# Altium PCB PD_PCB_with_routing.PcbDoc
Units mm, origin at the board's own origin, x right, y up, seen from the top; angles counter-clockwise.
Board outline 60.05 x 60 mm, 2 copper layers (Top Layer, Bottom Layer); 49 components, 27 nets, 162 pads, 63 vias.
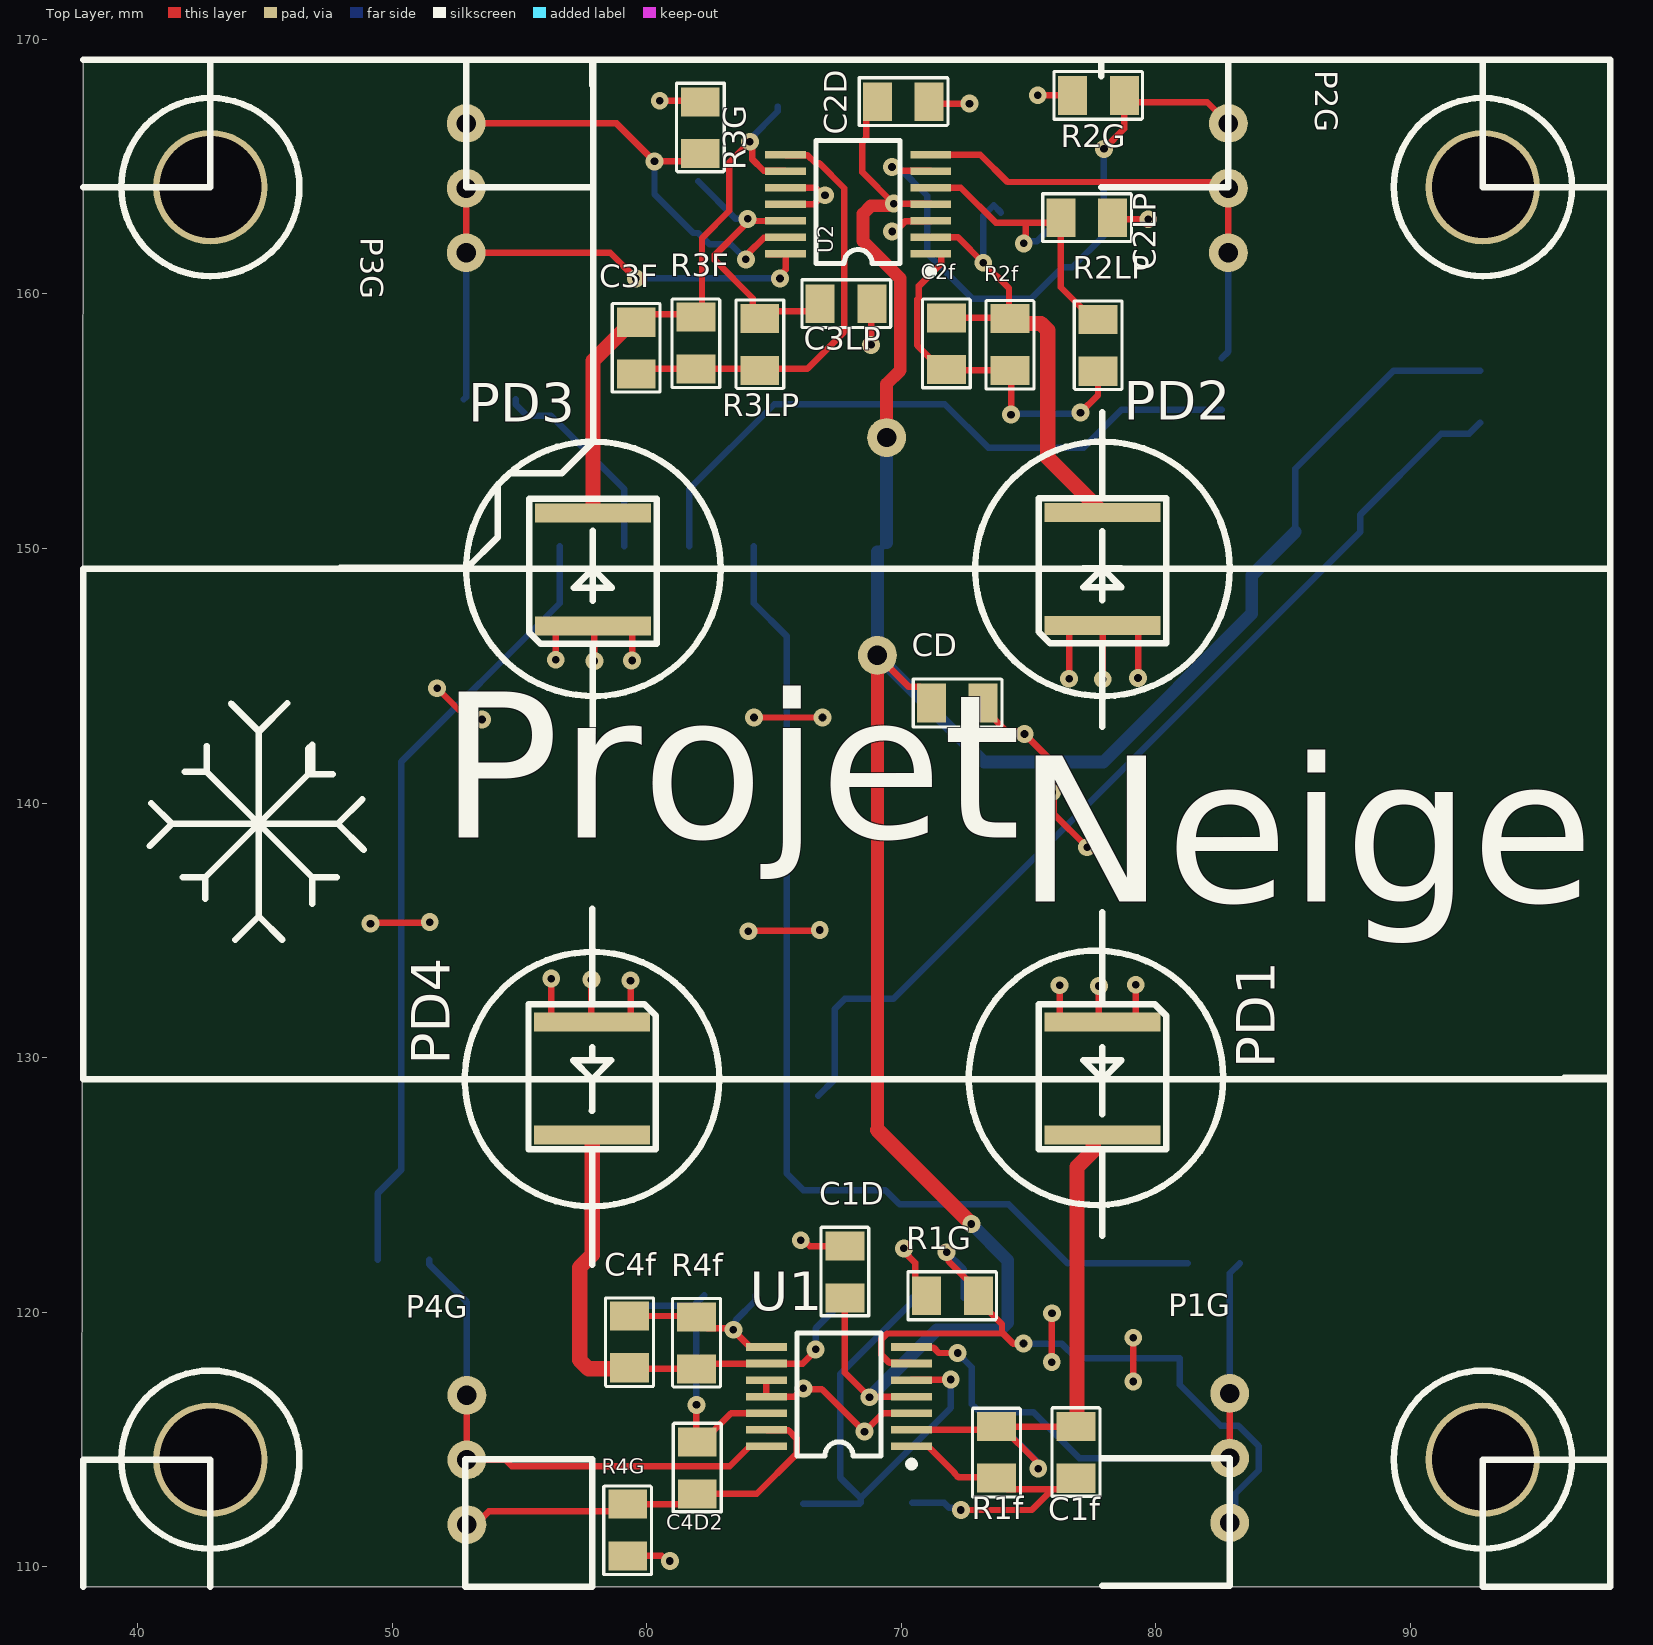
[diagram p0: Top Layer view]
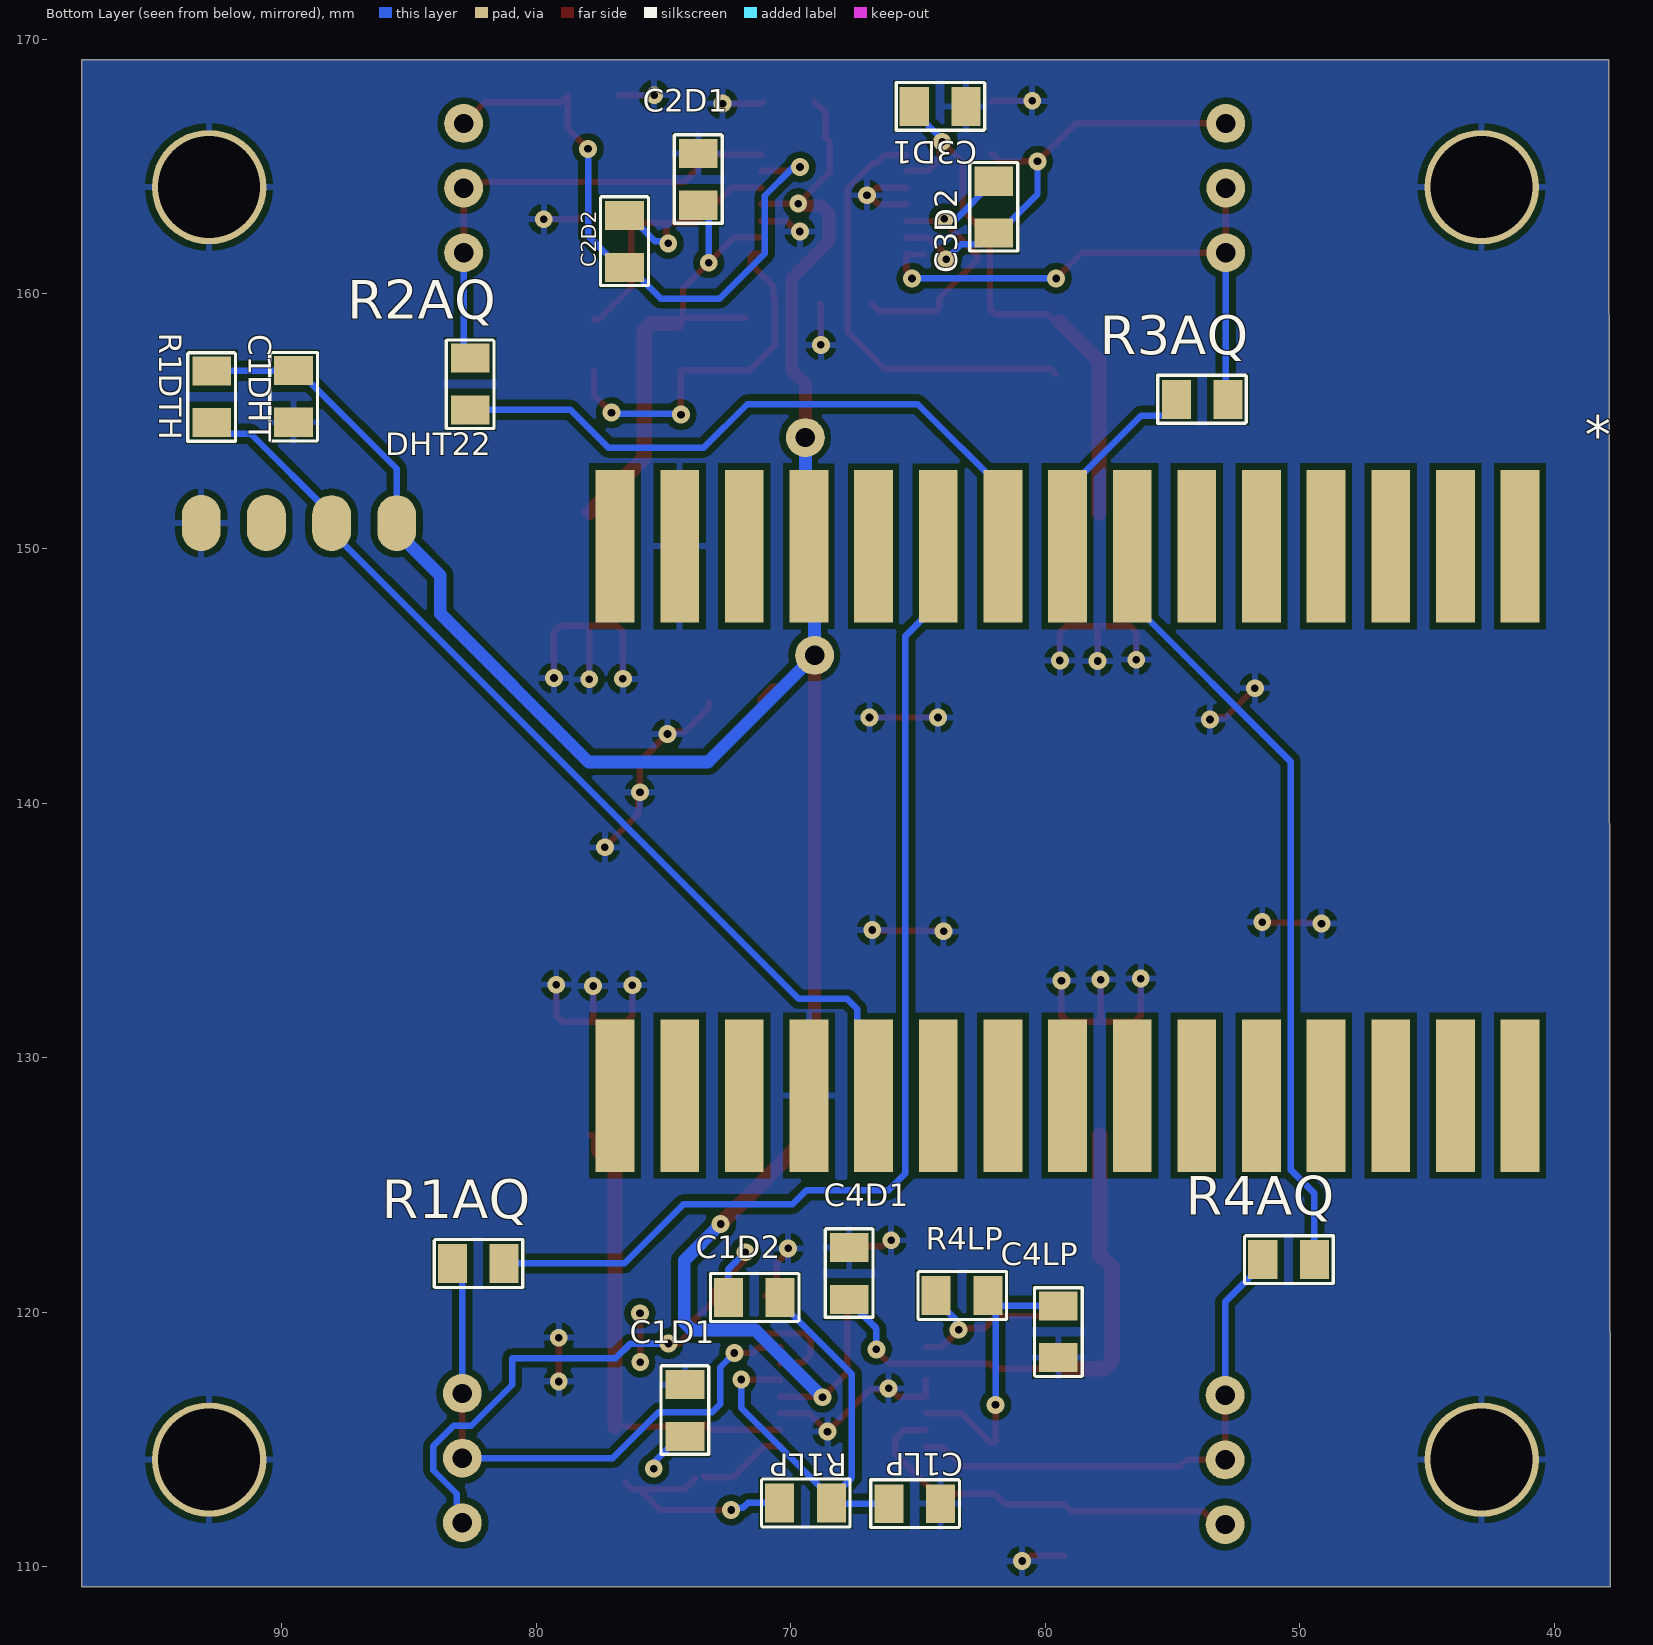
[diagram p1: Bottom Layer view, seen from below]
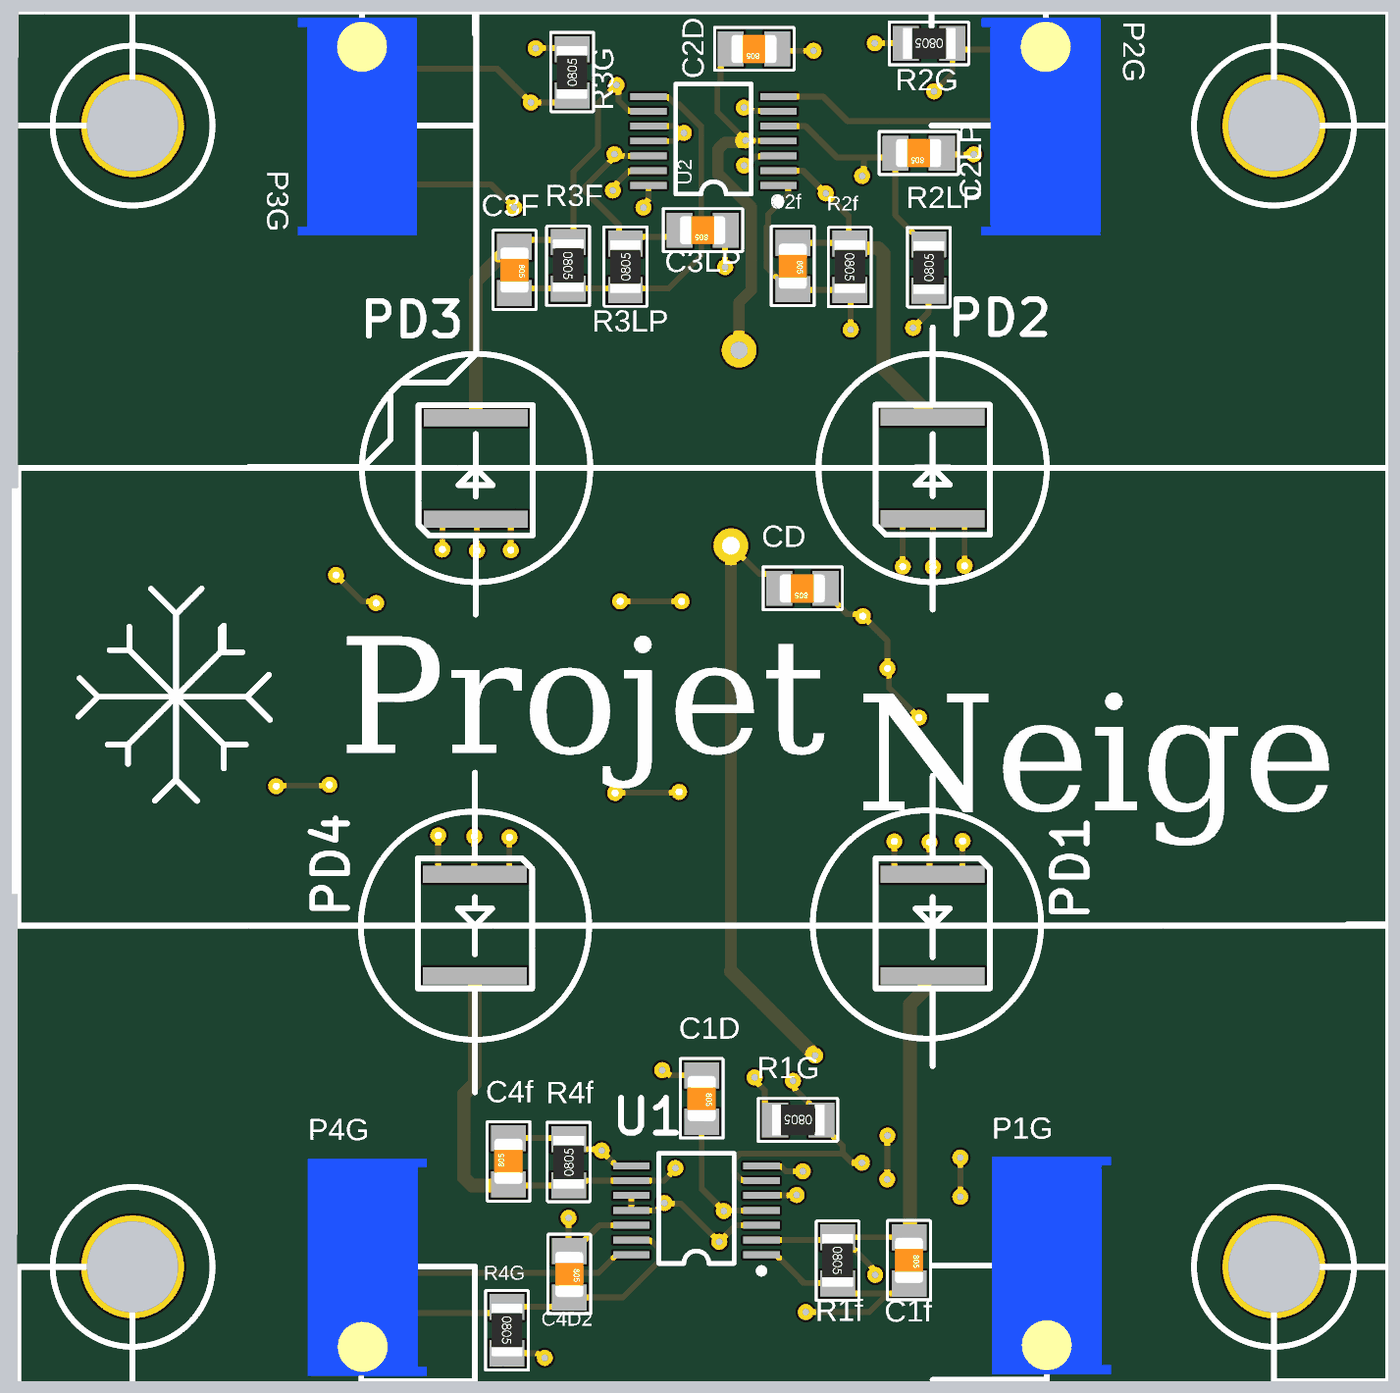
[diagram p2: 3D render of the assembled board from above, using the file's embedded part models]
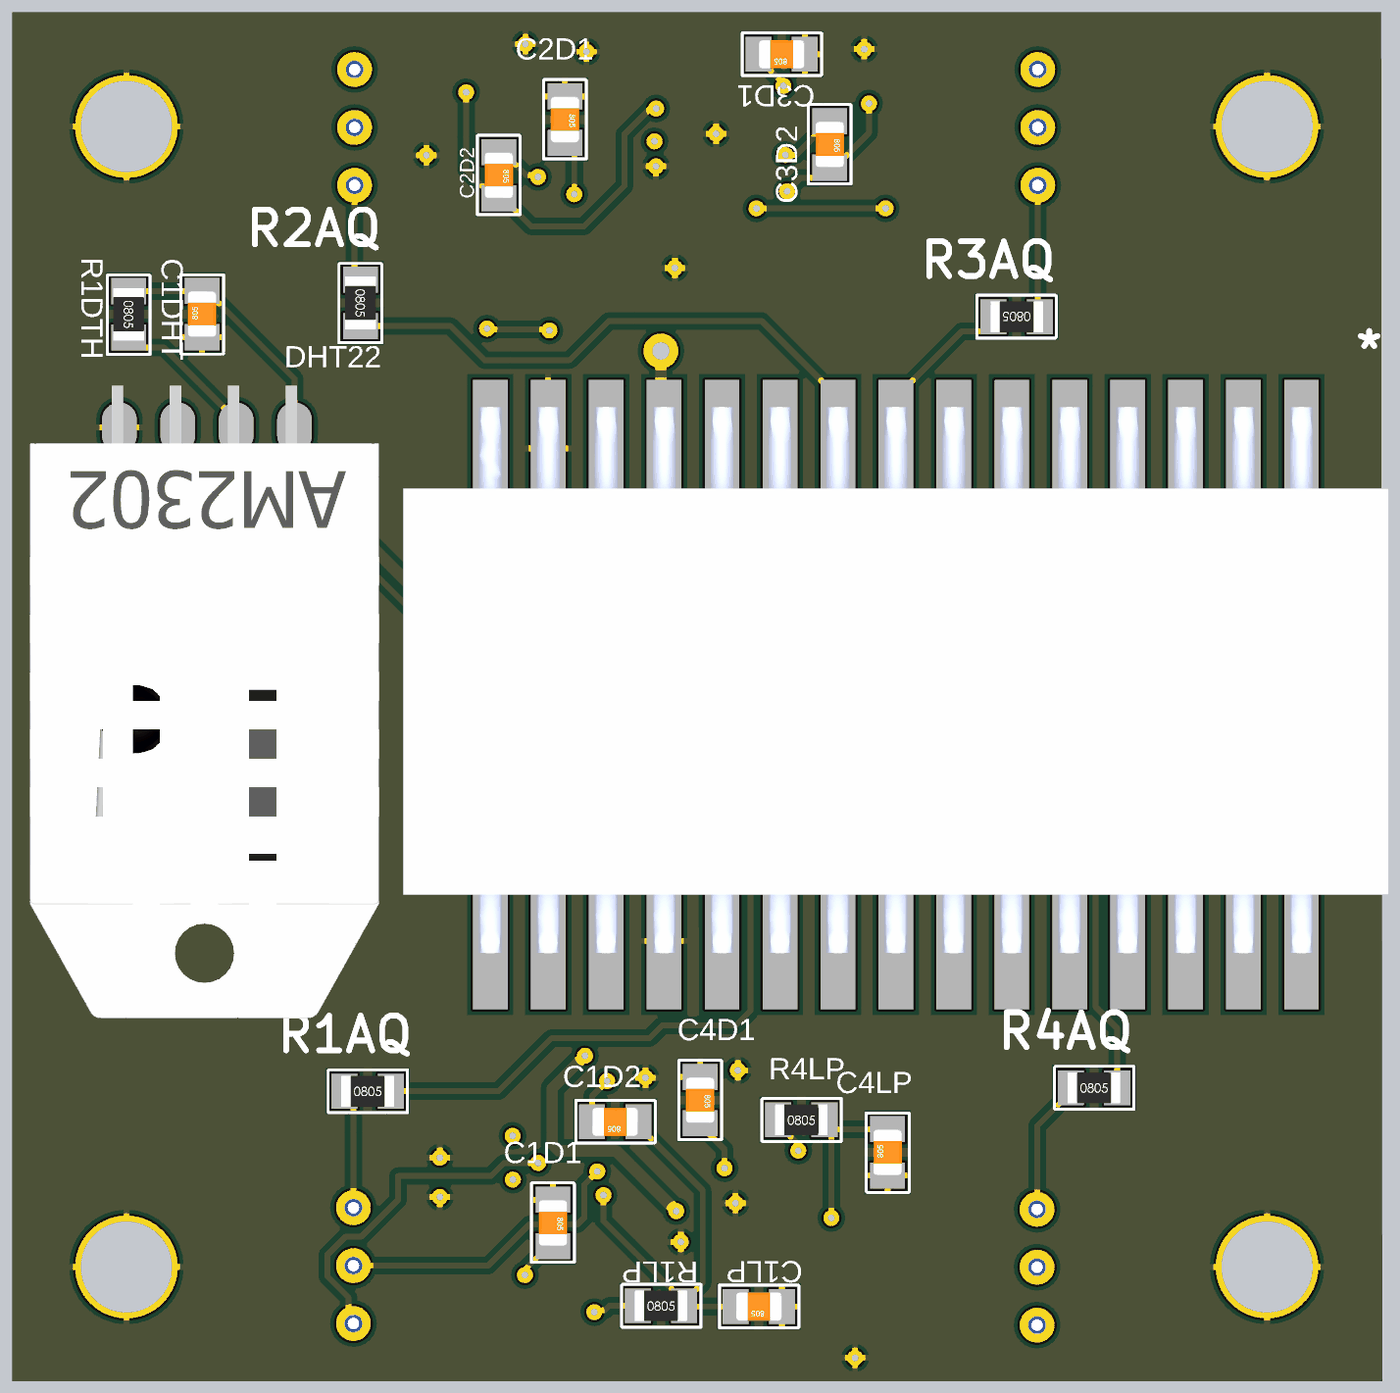
[diagram p3: 3D render of the assembled board from below, using the file's embedded part models]

## Layer stack, top to bottom
Top Solder: solder mask 0.0102, Solder Resist, Dk 3.5
Top Layer: signal copper 0.0356
Dielectric 1: dielectric 0.32, FR-4, Dk 4.8
Bottom Layer: signal copper 0.0356
Bottom Solder: solder mask 0.0102, Solder Resist, Dk 3.5

## Board outline
37.85,169.2 97.85,169.2 97.85,109.2 37.8,109.2

## Design rules (kind name [scope] priority, off if disabled: settings)
Clearance [All] p1: gap=0.254 ignorepadtopadclearanceinfootprint=FALSE except(0: Arc-Hole Track-Hole SMDPad-Hole THPad-Hole Via-Hole Fill-Hole Poly-Hole Region-Hole Text-Hole)
PolygonConnect [All] p1: connectstyle=Relief reliefconductorwidth=0.254 reliefentries=4 polygonreliefangle="90 Angle" airgapwidth=0.254
RoutingVias [All] p1: holewidth=0.711 width=1.27 viastyle="Through Hole" minholewidth=0.711 minwidth=1.27 maxholewidth=0.711 maxwidth=1.27
SilkToSilkClearance [All] p1: silktosilkclearance=0.05
SilkToSolderMaskClearance [IsPad] p1: minsilkscreentomaskgap=0.05 clearancetoexposedcopper=TRUE
SolderMaskExpansion [All] p1: expansion=0.102 istentingtop=FALSE
Width [All] p1: maxlimit=0.6 minlimit=0.254 preferedwidth=0.254 minimp=50.000000 maximp=50.000000 favimp=50.000000
28 further rules are at their usual default settings.

## Classes and differential pairs
component class Sheet1: * C1DHT CD DHT22 R1DTH
component class photodiodeAmplifier: C1D C1D1 C1D2 C1f C1LP C2D C2D1 C2D2 C2f C2LP C3D1 C3D2 C3F C3LP C4D1 C4D2 C4f C4LP P1G P2G P3G P4G PD1 PD2 PD3 PD4 R1AQ R1f R1G R1LP R2AQ R2f R2G R2LP R3AQ R3F R3G R3LP R4AQ R4f R4G R4LP U1 U2

## Components (designator, comment, footprint, x,y, rotation, side; value= is the part's Value field where it differs from the comment)
* "Arduino_Nano" "Arduino Nano SMD" 76.9,129.77 r90 bottom
C1D "10nF" "CAP 0805" 67.6,121.45 r90 top value="5 pF"
C1D1 "100 pF" "CAP 0805" 74.337,116.01 r90 bottom value="5 pF"
C1D2 "100 pF" "CAP 0805" 71.55,120.75 r180 bottom value="5 pF"
C1DHT "100 nF" "CAP 0805" 89.35,156.1 r270 bottom value="5 pF"
C1f "100 nF" "CAP 0805" 76.68,114.36 r90 top value="5 pF"
C1LP "1 uF" "CAP 0805" 65.25,112.65 r180 bottom value="5 pF"
C2D "10nF" "CAP 0805" 69.95,167.74 r0 top value="5 pF"
C2D1 "100 pF" "CAP 0805" 73.81,164.38 r90 bottom value="5 pF"
C2D2 "100 pF" "CAP 0805" 76.706,161.939 r90 bottom value="5 pF"
C2f "100 nF" "CAP 0805" 71.59,157.92 r90 top value="5 pF"
C2LP "1 uF" "CAP 0805" 77.16,163.18 r0 top value="5 pF"
C3D1 "100 pF" "CAP 0805" 64.25,167.55 r180 bottom value="5 pF"
C3D2 "100pF" "CAP 0805" 62.2,163.29 r90 bottom value="5 pF"
C3F "100 nF" "CAP 0805" 59.4,157.75 r90 top value="5 pF"
C3LP "1 uF" "CAP 0805" 67.7,159.8 r0 top value="5 pF"
C4D1 "100pF" "CAP 0805" 67.88,121.39 r90 bottom value="5 pF"
C4D2 "100pF" "CAP 0805" 61.8,113.75 r90 top value="5 pF"
C4f "100 nF" "CAP 0805" 59.5,118.95 r270 top value="5 pF"
C4LP "1 uF" "CAP 0805" 59.3,119.35 r270 bottom value="5 pF"
CD "100 nF" "CAP 0805" 72.07,144.11 r0 top value="5 pF"
DHT22 "DHT22" "DHT22 - 90deg SMD" 85.48,150.995 r270 bottom
P1G "*" "potentiometer trimmer straight" 82.9,116.8 r270 top value=100k
P2G "Potentiometer Trimmer 90deg" "potentiometer trimmer straight" 82.85,161.62 r90 top value=100k
P3G "Potentiometer Trimmer 90deg" "potentiometer trimmer straight" 52.9,161.62 r90 top value=100k
P4G "" "potentiometer trimmer straight" 52.93,116.73 r270 top value=100k
PD1 "TEMD5080X01" "Photodiode SMD PKG-1" 77.9,131.4 r0 top
PD2 "TEMD5080X01" "Photodiode SMD PKG-1" 77.9,146.97 r180 top
PD3 "TEMD5080X01" "Photodiode SMD PKG-1" 57.88,146.95 r180 top
PD4 "TEMD5080X01" "Photodiode SMD PKG-1" 57.85,131.4 r0 top
R1AQ "RES 0805" "RES 0805" 83.266,121.597 r0 bottom value=1k
R1DTH "RES 0805" "RES 0805" 93.063,156.956 r90 bottom value=10k
R1f "RES 0805" "RES 0805" 73.427,115.476 r90 top value=100k
R1G "RES 0805" "RES 0805" 73,120.95 r0 top value=2.2k
R1LP "RES 0805" "RES 0805" 70.406,112.187 r0 bottom value=10k
R2AQ "RES 0805" "RES 0805" 82.903,157.456 r90 bottom value=1k
R2f "RES 0805" "RES 0805" 73.957,159.004 r90 top value=100k
R2G "RES 0805" "RES 0805" 78.736,168.113 r0 top value=2.2k
R2LP "RES 0805" "RES 0805" 78.04,156.99 r270 top value=10k
R3AQ "RES 0805" "RES 0805" 52.834,156.173 r180 bottom value=1k
R3F "RES 0805" "RES 0805" 61.617,159.066 r90 top value=100k
R3G "RES 0805" "RES 0805" 62.413,165.544 r270 top value=10k
R3LP "RES 0805" "RES 0805" 64.753,157.024 r270 top value=10k
R4AQ "RES 0805" "RES 0805" 51.424,121.747 r0 bottom value=1k
R4f "RES 0805" "RES 0805" 62.263,117.794 r270 top value=100k
R4G "RES 0805" "RES 0805" 58.937,112.424 r90 top value=2.2k
R4LP "RES 0805" "RES 0805" 64.256,120.337 r0 bottom value=10k
U1 "TSZ124" TSSOP14 67.55,117.65 r90 top
U2 "TSZ124" TSSOP14 68.3,164.5 r90 top

## Footprints (in the part's own frame and the unit in brackets; to place one, negate y for a bottom-side part, rotate by r counter-clockwise, add the part's x,y. Pads: shape width x height; smd on the part's side, far side on the other; paste and mask are expansions set on the pad)
"Arduino Nano SMD" [mm]
  rect 6x1.524 smd: 0(-1.27,0) 1(-1.27,-2.54) 2(-1.27,-5.08) 3(-1.27,-7.62) 4(-1.27,-10.16) 5(-1.27,-12.7) 6(-1.27,-15.24) 7(-1.27,-17.78) 8(-1.27,-20.32) 9(-1.27,-22.86) 10(-1.27,-25.4) 11(-1.27,-27.94) 12(-1.27,-30.48) 13(-1.27,-33.02) 14(-1.27,-35.56) 15(20.32,-35.56) 16(20.32,-33.02) 17(20.32,-30.48) 18(20.32,-27.94) 19(20.32,-25.4) 20(20.32,-22.86) 21(20.32,-20.32) 22(20.32,-17.78) 23(20.32,-15.24) 24(20.32,-12.7) 25(20.32,-10.16) 26(20.32,-7.62) 27(20.32,-5.08) 28(20.32,-2.54) 29(20.32,0)
  body extent -1.81,-39.37 22.13,3.81, height 5.5
"CAP 0805" [mil]
  rect 45x60 smd: 1(44.84,-7.2) 2(-35.16,-7.2)
  silkscreen extent -63,-44 74,30, body extent -35,-32 44,17, height 31
"DHT22 - 90deg SMD" [mm]
  oval 2.2x1.524 smd: 1(0,0) 2(0,-2.56) 3(-0.005,-5.12) 4(-0.005,-7.68)
  body extent -1.85,-11.6 25.89,3.7, height 7.8
"Photodiode SMD PKG-1" [mm] "package type 1 -"
  rect 4.55x0.75 smd: 1(0,0) 2(0,-4.45)
  silkscreen extent -2.5,-5 2.5,0.7, body extent -2.15,-4.75 2.05,0.25, height 1.12
"potentiometer trimmer straight" [mil]
  round 60 hole 30: 1(0,0) 2(100,0) 3(200,0)
  body extent -87,-95 288,111, height 460
"RES 0805" [mil]
  rect 45x60 smd: 1(1.02,-12.32) 2(-78.98,-12.32)
  silkscreen extent -108,-49 29,25, body extent -84,-39 6,14, height 30
TSSOP14 [mm] "Shrink Small Outline; 14 Leads; Body Width 4.4 mm; Pitch 0.65 mm"
  rect 0.3x1.6 smd: 1(-2.925,-2.85) 2(-2.275,-2.85) 3(-1.625,-2.85) 4(-0.975,-2.85) 5(-0.325,-2.85) 6(0.325,-2.85) 7(0.975,-2.85) 8(0.975,2.85) 9(0.325,2.85) 10(-0.325,2.85) 11(-0.975,2.85) 12(-1.625,2.85) 13(-2.275,2.85) 14(-2.925,2.85)
  silkscreen extent -3.75,-2.97 1.52,1.65, body extent -3.43,-1.91 1.65,1.91, height 1.2

## Part data
C1D C1D1 C1D2 C1DHT C1f C1LP C2D C2D1 C2D2 C2f C2LP C3D1 C3D2 C3F C3LP C4D1 C4D2 C4f C4LP CD: library part "CAP 0805"
P1G P4G: library part "Potentiometer Trimmer 90deg"
PD1 PD2 PD3 PD4: "PIN Sillicium photodiode."
R1AQ R1DTH R1f R1G R1LP R2AQ R2f R2G R2LP R3AQ R3F R3G R3LP R4AQ R4f R4G R4LP: "SMD Resistor 0805"

## Free pads (board coordinates)
  round 4.5 hole 4: 2(42.85,114.2) 2(42.85,164.2) 2(92.85,114.2) 2(92.85,164.2)
  round 1.524 hole 0.762: 3(69.06,145.8) 3(69.42,154.36)

## Via types
v1: diameter 0.7, hole 0.3, Top Layer to Bottom Layer, 63 vias

## Nets (pads, with @x,y where several pads share a name; then routed paths per layer and width w, separated by ;. In a path a pad name is that pad's centre, name@x,y a point inside that pad or via, vN(x,y) a via of type N, cw(c..) or ccw(c..) an arc to the next point about the centre after c; other vN are vias at no path point)
GND: *.3 *.28 C1D1.1 C1D.1 C1DHT.1 C1LP.1 C2D1.1 C2D.1 C2LP.1 C3D1.1 C3LP.1 C4D1.1 C4LP.1 CD.1 DHT22.4 pad.2 PD1.1 PD2.1 PD3.1 PD4.1 R1G.2 R2G.2 R3G.2 R4G.2 U1.3 U1.10 U1.11 U2.3 U2.10 U2.11 | length 75.8
  Top Layer w0.254: v1(49.14,135.26) 49.17,135.29 51.44,135.29 v1(51.47,135.32) ; v1(51.76,144.51) 52.905,143.365 53.435,143.365 v1(53.52,143.28) ; v1(56.24,133.1) 56.24,131.648 56.488,131.4 PD4.1 ; v1(56.42,145.63) 56.42,146.702 56.668,146.95 PD3.1 ; v1(57.82,133.06) 57.82,131.43 PD4.1 ; v1(57.94,145.58) 57.94,146.89 PD3.1 ; R4G.2 60.581,110.418 60.785,110.214 v1(60.906,110.214) ; v1(59.36,133.02) 59.36,131.648 59.112,131.4 PD4.1 ; v1(59.42,145.6) 59.42,146.702 59.172,146.95 PD3.1 ; v1(60.51,167.59) 62.06,167.59 R3G.2 ; v1(63.99,134.96) 64.015,134.985 66.765,134.985 v1(66.79,135.01) ; v1(64.21,143.36) v1(66.9,143.36) ; U1.10 U1.11 65.795,116.675 66.12,117 66.151,116.969 66.881,116.969 v1(68.55,115.3) 69.275,116.025 U1.3 ; U2.11 66.571,163.525 66.926,163.88 66.631,164.175 U2.10 ; v1(66.05,122.82) 66.171,122.82 66.402,122.589 C1D.1 ; v1(68.81,158) 68.81,159.588 C3LP.1 ; v1(69.637,162.453) 69.644,162.46 69.751,162.46 70.143,162.852 71.127,162.852 U2.3 ; v1(70.1,122.5) 70.1,122.379 70.55,121.93 70.55,121.082 R1G.2 ; C2D.1 71.166,167.48 v1(72.68,167.48) ; CD.1 73.209,143.736 74.15,142.795 74.755,142.795 v1(74.84,142.71) 75.92,141.63 v1(75.92,140.42) 75.992,140.348 75.992,139.568 v1(77.3,138.26) ; v1(75.362,167.81) 76.72,167.81 R2G.2 ; v1(76.22,132.84) 76.22,131.648 76.468,131.4 PD1.1 ; v1(76.59,144.88) 76.59,146.722 76.838,146.97 PD2.1 ; v1(77.76,132.81) 77.76,131.54 PD1.1 ; v1(77.91,144.86) 77.91,146.96 PD2.1 ; C2LP.1 78.356,162.94 v1(79.7,162.94) ; v1(79.11,117.27) v1(79.11,118.99) ; v1(79.21,132.86) 79.21,131.648 78.962,131.4 PD1.1 ; v1(79.3,144.91) 79.3,146.722 79.052,146.97 PD2.1
  other v1: 66.15,117 67,163.88
Net*_4: *.4 DHT22.2 R1DTH.2 | length 39
  Bottom Layer w0.254: *.4 67.375,129.135 67.375,131.895 67.78,132.3 69.683,132.3 88.04,150.657 DHT22.2 88.04,151.333 91.213,154.505 92.305,154.505 R1DTH.2
Net*_21: *.21 R4AQ.2 | length 31
  Bottom Layer w0.254: R4AQ.2 49.418,124.657 50.357,125.596 50.357,141.629 56.58,147.852 *.21
Net*_22: *.22 R3AQ.2 | length 8.1
  Bottom Layer w0.254: R3AQ.2 54.84,155.67 55.284,155.225 56.223,155.225 59.12,152.328 *.22
Net*_23: *.23 R2AQ.2 | length 25.9
  Bottom Layer w0.254: *.23 61.66,152.328 65.002,155.67 71.71,155.67 73.42,153.96 77.16,153.96 78.65,155.45 R2AQ.2
Net*_24: *.24 R1AQ.2 | length 42.4
  Bottom Layer w0.254: *.24 64.2,147.852 65.49,146.562 65.49,125.449 66.153,124.786 69.374,124.786 69.93,124.23 74.213,124.23 76.533,121.91 R1AQ.2
NetC1D1_2: C1D1.2 C1f.1 PD1.2 R1f.1 U1.2 | length 22.3
  Top Layer w0.254: U1.2 73.193,115.375 R1f.1@73.4,115.582 ; R1f.1 73.743,115.499 C1f.1 ; R1f.1@73.93,115.502 75.299,114.133 v1@75.299,113.817 ; PD1.2@77.543,126.702 77.791,126.95 PD1.2
  Top Layer w0.6: C1f.1@76.906,115.486 76.906,125.706 77.543,126.343 PD1.2@77.543,126.702
  Bottom Layer w0.254: C1D1.2 74.344,115.117 v1@75.554,113.907
  other v1: 75.382,113.847
NetC1D2_1: C1D2.1 C1LP.2 R1LP.2 U1.5 | length 19.5
  Top Layer w0.254: U1.5 70.412,117.338 71.928,117.338 v1(71.94,117.35)
  Bottom Layer w0.254: C1LP.2 68.367,112.467 R1LP.2 R1LP.2@68.4,112.691 ; C1D2.1 70.411,120.377 67.59,117.556 67.59,113.5 R1LP.2@68.4,112.691 ; v1(71.94,117.35) 71.94,116.231 R1LP.2@68.4,112.691
NetC1D2_2: C1D2.2 P1G.3 R1G.1 U1.6 | length 29
  Top Layer w0.254: U1.6 70.377,117.998 69.538,117.998 69.219,118.317 69.219,118.933 69.442,119.156 73.994,119.156 ; v1(71.78,122.35) 71.865,122.265 71.865,121.988 73.026,120.828 R1G.1 73.026,120.447 73.955,119.518 73.955,119.195 73.994,119.156 ; v1(74.801,118.761) 74.389,118.761 73.994,119.156
  Bottom Layer w0.254: v1(71.78,122.35) 72.443,121.687 C1D2.2 ; v1(74.801,118.761) 76.295,118.761 76.867,118.189 80.941,118.189 80.941,117.143 82.554,115.53 83.246,115.53 84.043,114.733 84.043,113.787 83.119,112.863 83.119,111.939 P1G.3
NetC1f_2: C1f.2 R1f.2 R1LP.1 U1.1 | length 12.2
  Top Layer w0.254: U1.1 71.05,114.725 72.1,113.675 72.1,113.649 72.249,113.5 73.35,113.5 R1f.2@73.4,113.55 ; v1(72.34,112.22) 75.125,112.22 75.942,113.036 ; R1f.2 74.174,113.036 75.942,113.036 ; C1f.2@76.499,113.293 76.242,113.036 75.942,113.036
  Bottom Layer w0.254: R1LP.1 71.679,112.5 71.879,112.3 v1@72,112.3
NetC2D1_2: C2D1.2 C2f.1 PD2.2 R2f.1 U2.2 | length 20.1
  Top Layer w0.254: U2.2 72.226,162.225 v1(73.22,161.231) 74.23,160.221 74.23,159.183 R2f.1@74.174,159.126 ; C2f.1 74.241,159.059 R2f.1 R2f.1@74.459,158.841
  Top Layer w0.6: R2f.1@74.459,158.841 75.487,158.841 75.75,158.578 75.75,153.57 PD2.2
  Bottom Layer w0.254: v1(73.22,161.231) 73.22,163.08 C2D1.2 C2D1.2@73.914,163.2
NetC2D2_1: C2D2.1 C2LP.2 R2LP.2 U2.5 | length 13.5
  Top Layer w0.254: U2.5 72.337,164.175 73.715,162.797 74.891,162.797 ; v1(74.81,161.99) 74.891,162.071 74.891,162.797 ; R2LP.2 77.536,158.996 76.267,160.265 C2LP.2 76.067,162.797 74.891,162.797
  Bottom Layer w0.254: v1(74.81,161.99) 74.895,162.075 75.33,162.075 76.333,163.078 C2D2.1
NetC2D2_2: C2D2.2 P2G.3 R2G.1 U2.6 | length 24.8
  Top Layer w0.254: v1(69.63,164.99) 69.772,164.848 71.127,164.848 U2.6 ; v1(77.96,165.7) 78.762,166.502 R2G.1 79.032,167.53 82.02,167.53 P2G.3
  Bottom Layer w0.254: v1(69.63,164.99) 69.89,164.99 71.02,163.86 71.02,161.59 72.79,159.82 75.106,159.82 76.333,161.046 C2D2.2 76.714,161.046 77.96,162.293 v1(77.96,165.7)
NetC2f_2: C2f.2 R2f.2 R2LP.1 U2.1 | length 14.9
  Top Layer w0.254: U2.1 71.544,161.575 71.567,161.552 71.567,161.193 70.691,160.317 70.691,159.849 70.63,159.788 70.63,157.98 71.612,156.998 R2f.2 74.31,156.958 v1(74.31,155.26) ; v1(77.04,155.34) 77.727,156.027 R2LP.1
  Bottom Layer w0.254: v1(74.31,155.26) 74.35,155.3 77,155.3 v1(77.04,155.34)
NetC3D1_2: C3D1.2 C3F.1 PD3.2 R3F.1 U2.9 | length 22.5
  Top Layer w0.254: C3F.1@59.392,158.889 C3F.1 59.894,159.2 61.939,159.2 62.167,159.428 62.167,162.191 63.243,163.267 63.243,165.173 v1(64.05,165.98) 64.135,165.895 64.135,165.301 64.588,164.848 65.427,164.848 U2.9
  Top Layer w0.6: PD3.2 57.88,157.377 C3F.1@59.392,158.889
  Bottom Layer w0.254: v1(64.05,165.98) 64.05,166.084 65.143,167.177 C3D1.2
NetC3D2_1: C3D2.1 C3LP.2 R3LP.2 U2.12 | length 11.4
  Top Layer w0.254: U2.12 65.442,162.868 63.998,162.868 63.762,162.631 63.762,162.622 62.675,161.535 62.675,161.325 64.166,159.834 64.166,159.474 64.311,159.33 66.52,159.33 C3LP.2
  Bottom Layer w0.254: C3D2.1 63.496,162.95 v1(63.96,162.95)
NetC3D2_2: C3D2.2 P3G.3 R3G.1 U2.13 | length 17.9
  Top Layer w0.254: P3G.3 58.81,166.7 v1(60.3,165.21) 61.792,165.21 R3G.1 ; v1(63.89,161.36) 63.975,161.445 63.975,161.589 64.588,162.202 65.427,162.202 U2.13
  Bottom Layer w0.254: v1(60.3,165.21) 60.3,163.924 61.827,162.397 C3D2.2 62.462,161.953 63.297,161.953 v1(63.89,161.36)
NetC3F_2: C3F.2 R3F.2 R3LP.1 U2.8 | length 17.4
  Top Layer w0.254: C3F.2 59.786,157.06 R3F.2 64.44,157.06 66.31,157.06 67.76,158.51 67.76,164.154 66.781,165.133 66.631,165.133 66.312,165.452 65.473,165.452 U2.8
NetC4D1_2: C4D1.2 C4f.1 PD4.2 R4f.1 U1.9 | length 22.4
  Top Layer w0.254: C4f.1@58.873,118.255 C4f.1 59.36,117.768 R4f.1 62.157,117.975 U1.9 66.125,117.975 v1@66.65,118.5
  Top Layer w0.6: PD4.2 57.85,122.24 57.36,121.75 57.36,118.117 57.711,117.766 59.272,117.766 C4f.1
  Bottom Layer w0.254: v1(66.63,118.53) 66.63,119.35 67.93,120.65 67.89,120.69 C4D1.2
NetC4D2_1: C4D2.1 C4LP.2 R4LP.2 U1.12 | length 11.6
  Top Layer w0.254: v1(61.95,116.35) 61.95,114.922 C4D2.1 62.174,114.889 63.309,116.025 U1.12
  Bottom Layer w0.254: C4LP.2 61.843,120.243 R4LP.2@61.95,120.35 ; v1(61.95,116.35) R4LP.2@61.95,120.35 ; R4LP.2 R4LP.2@61.95,120.35
NetC4D2_2: C4D2.2 P4G.3 R4G.1 U1.13 | length 16
  Top Layer w0.254: P4G.3 53.274,111.65 53.794,112.17 58.97,112.17 R4G.1 61.576,112.45 C4D2.2 64.321,112.857 65.881,114.417 65.881,115.033 65.562,115.352 64.723,115.352 U1.13
NetC4f_2: C4f.2 R4f.2 R4LP.1 U1.8 | length 7.6
  Top Layer w0.254: C4f.2 61.907,119.843 R4f.2 62.395,119.355 63.345,119.355 63.345,119.33 64.05,118.625 U1.8
  Bottom Layer w0.254: v1(63.4,119.3) 63.485,119.385 63.485,119.663 64.282,120.459 R4LP.1
NetP1G_1: P1G.1 P1G.2 R1AQ.1 U1.7 | length 23
  Top Layer w0.254: U1.7 70.423,118.602 71.262,118.602 71.474,118.39 v1(72.21,118.39) ; P1G.2 P1G.1
  Bottom Layer w0.254: v1(72.21,118.39) 72.77,117.83 72.77,116.374 72.919,116.226 72.927,116.226 73.083,116.069 75.181,116.069 76.99,114.26 P1G.2 ; P1G.1 82.9,121.518 R1AQ.1
NetP2G_1: P2G.1 P2G.2 R2AQ.1 U2.7 | length 19
  Top Layer w0.254: U2.7 73.097,165.475 74.171,164.401 82.609,164.401 P2G.2 P2G.1
  Bottom Layer w0.254: R2AQ.1 82.85,157.742 P2G.1
NetP3G_1: P3G.1 P3G.2 R3AQ.1 U2.14 | length 22.8
  Top Layer w0.254: P3G.2 P3G.1 58.56,161.62 v1(59.57,160.61) ; U2.14@64.777,161.552 65.427,161.552 U2.14 65.45,160.951 65.23,160.731 v1(65.23,160.61)
  Bottom Layer w0.254: R3AQ.1 52.9,155.952 P3G.1 ; v1(59.57,160.61) v1(65.23,160.61)
NetP4G_1: P4G.1 P4G.2 R4AQ.1 U1.14 | length 20.7
  Top Layer w0.254: P4G.1 P4G.2 54.439,114.19 54.693,113.937 63.262,113.937 64.027,114.702 64.677,114.702 U1.14
  Bottom Layer w0.254: R4AQ.1 51.45,121.869 52.93,120.39 P4G.1
VCC: *.26 C1D.2 C1DHT.2 C2D.2 CD.2 DHT22.1 pad.3 R1DTH.1 U1.4 U2.4 | length 104
  Top Layer w0.254: C1D.2 67.783,117.617 v1(68.75,116.65) 68.763,116.663 70.387,116.663 U1.4 ; C2D.2 68.613,167.113 68.613,166.113 68.47,165.97 68.47,164.78 v1(69.7,163.55) ; pad.3@69.06,145.8 70.298,144.562 70.733,144.562 71.177,144.117 CD.2 ; v1@69.615,163.465 v1(69.7,163.55) ; U2.4 71.138,163.538 69.712,163.538 v1(69.7,163.55)
  Top Layer w0.5: 69.06,127.15 pad.3@69.06,145.8 ; pad.3@69.42,154.36 69.42,156.46 69.959,156.999 69.959,160.611 68.49,162.08 68.49,163.15 68.805,163.465 v1@69.615,163.465
  Top Layer w0.6: 69.06,127.15 v1(72.75,123.46)
  Bottom Layer w0.254: *.26@69.06,149.87 *.26 *.26@69.42,150.23 ; DHT22.1@85.48,150.657 DHT22.1 85.48,153.13 89.342,156.993 C1DHT.2 89.544,156.982 R1DTH.1
  Bottom Layer w0.5: v1(68.75,116.65) 71.391,119.291 73.887,119.291 74.18,119.584 74.18,122.03 v1(72.75,123.46) ; *.26@69.06,149.87 69.06,145.8 73.25,141.61 77.937,141.61 83.769,147.442 83.769,148.946 DHT22.1@85.48,150.657 ; *.26@69.42,150.23 pad.3@69.42,154.36
pads on no net: *.0 *.1 *.2 *.5 *.6 *.7 *.8 *.9 *.10 *.11 *.12 *.13 *.14 *.15 *.16 *.17 *.18 *.19 *.20 *.25 *.27 *.29 DHT22.3
copper on no net: | length 1.7
  Top Layer w0.254: v1(75.91,118.03) v1@75.91,119.75
  other v1: 75.92,119.95

## Polygon pours and split planes (outlines as drawn)
GND on Bottom Layer "GND_L02_P003" (solid, pour order 3): 37.85,169.2 97.85,169.2 97.85,109.2 37.8,109.2

## Silkscreen, mask and mechanical layers (free items; w line width, h text height)
Top Overlay:
  circle w0.254: c42.85,164.2 r3.5
  circle w0.254: c42.85,114.2 r3.5
  circle w0.254: c92.85,114.2 r3.5
  circle w0.254: c92.85,164.2 r3.5
  circle w0.254: c57.85,129.15 r5
  circle w0.254: c57.9,149.2 r5
  circle w0.254: c77.65,129.2 r5
  circle w0.254: c77.9,149.2 r5
  lines w0.254: 37.85,164.2 42.85,164.2 42.85,169.2 37.85,169.2 ; 42.85,109.2 42.85,114.2 37.85,114.2 37.85,109.2 ; 44.675,139.105 42.65,137.08 ; 47.95,149.25 52.9,149.25 ; 52.9,149.2 54.15,150.45 54.15,152.5 54.6,152.95 56.65,152.95 57.9,154.2 57.9,169.2 ; 57.84,127.9 57.85,127.9 57.85,129.15 ; 57.85,121.85 57.85,126.4 ; 57.85,132.1 57.85,135.85 ; 57.88,142.78 57.88,146.25 ; 57.88,147.95 57.88,150.69 57.88,149.2 ; 62.9,149.2 72.9,149.2 77.9,149.2 85.4,149.2 ; 77.85,164.2 82.85,164.2 ; 77.9,109.25 82.9,109.25 82.9,114.25 77.9,114.25 ; 77.9,123 77.9,126.4 ; 77.9,129.15 77.9,127.77 77.9,130.4 ; 77.9,132.1 77.9,135.71 ; 77.9,143 77.9,146.27 ; 77.9,147.97 77.9,150.68 ; 77.9,151.97 77.9,155.36 ; 82.83,164.2 82.85,164.2 ; 86.1,149.2 96.25,149.2 ; 91.85,169.2 97.85,169.2 ; 97.85,114.2 92.85,114.2 92.85,109.2 97.85,109.2 ; 37.85,109.2 37.85,110.3 37.85,109.2 ; 37.85,169.2 38.95,169.2 37.85,169.2 ; 37.85,169.2 57.85,169.2 ; 41.34,139.18 44.75,139.18 ; 41.34,139.18 40.53,139.99 41.34,139.18 ; 41.34,139.18 40.47,138.31 41.34,139.18 ; 41.34,139.18 44.75,139.18 ; 41.34,139.18 47.78,139.18 47.86,139.18 ; 41.34,139.18 44.75,139.18 ; 42.65,137.08 41.76,137.08 42.65,137.08 ; 42.65,137.08 42.65,136.24 42.65,137.08 ; 42.65,137.08 46.7,141.13 ; 42.71,141.22 41.85,141.22 42.71,141.22 ; 42.71,141.22 42.71,142.24 42.71,141.22 ; 42.71,141.22 44.75,139.18 ; 44.75,135.55 44.75,139.18 ; 44.75,135.55 45.68,134.62 44.75,135.55 ; 44.75,135.55 43.83,134.63 44.75,135.55 ; 44.75,135.55 44.75,139.18 ; 44.75,135.55 44.75,142.81 44.76,142.81 ; 44.75,139.18 46.7,141.13 ; 44.75,139.18 46.85,137.08 ; 44.75,139.18 46.85,137.08 ; 44.75,139.18 44.75,142.82 43.66,143.91 44.76,142.81 ; 44.75,139.18 44.75,142.8 45.87,143.92 44.76,142.81 ; 44.75,139.18 47.86,139.18 ; 46.7,141.13 46.85,141.28 46.85,142.29 46.7,142.14 46.7,141.13 ; 46.7,141.13 47.66,141.13 46.7,141.13 ; 46.85,137.08 47.81,137.08 46.85,137.08 ; 46.85,137.08 46.85,136.04 46.85,137.08 ; 47.86,139.18 48.82,140.14 47.86,139.18 ; 47.86,139.18 48.87,138.17 47.86,139.18 ; 57.85,129.15 47.9,129.15 37.85,129.15 37.85,149.2 47.95,149.2 97.85,149.2 ; 57.85,129.15 87.95,129.15 97.85,129.15 97.85,149.2 ; 57.85,169.2 77.85,169.2 ; 57.85,169.2 57.85,168.2 57.85,169.2 ; 57.9,169.2 57.9,164.2 52.9,164.2 52.9,169.2 57.9,169.2 ; 77.85,169.2 82.85,169.2 82.85,164.2 ; 77.85,169.2 97.85,169.2 ; 77.85,169.2 77.85,168.55 77.85,169.2 ; 96.25,149.2 97.85,149.2 ; 96.25,149.2 97.85,149.2 ; 97.85,109.2 97.85,129.2 ; 97.85,109.2 96.75,109.2 97.85,109.2 ; 97.85,129.2 97.85,149.2 ; 97.85,129.2 96.05,129.2 97.85,129.2 ; 97.85,149.2 97.85,169.2 ; 97.85,169.2 92.85,169.2 92.85,164.2 97.85,164.2 97.85,169.2 ; 52.87,109.2 52.87,114.21 57.85,114.21 57.85,109.2 52.87,109.2
  text "Projet" at 51.85,136.723 h10
  text "Neige" at 74.51,134.213 h10